# Altium PCB Battery_charger.PcbDoc
Units mm, origin at the board's own origin, x right, y up, seen from the top; angles counter-clockwise.
Board outline 37.85 x 30.99 mm, 2 copper layers (Top Layer, Bottom Layer); 16 components, 12 nets, 60 pads, 17 vias.
Unrouted connection lines stored in the file: 1.
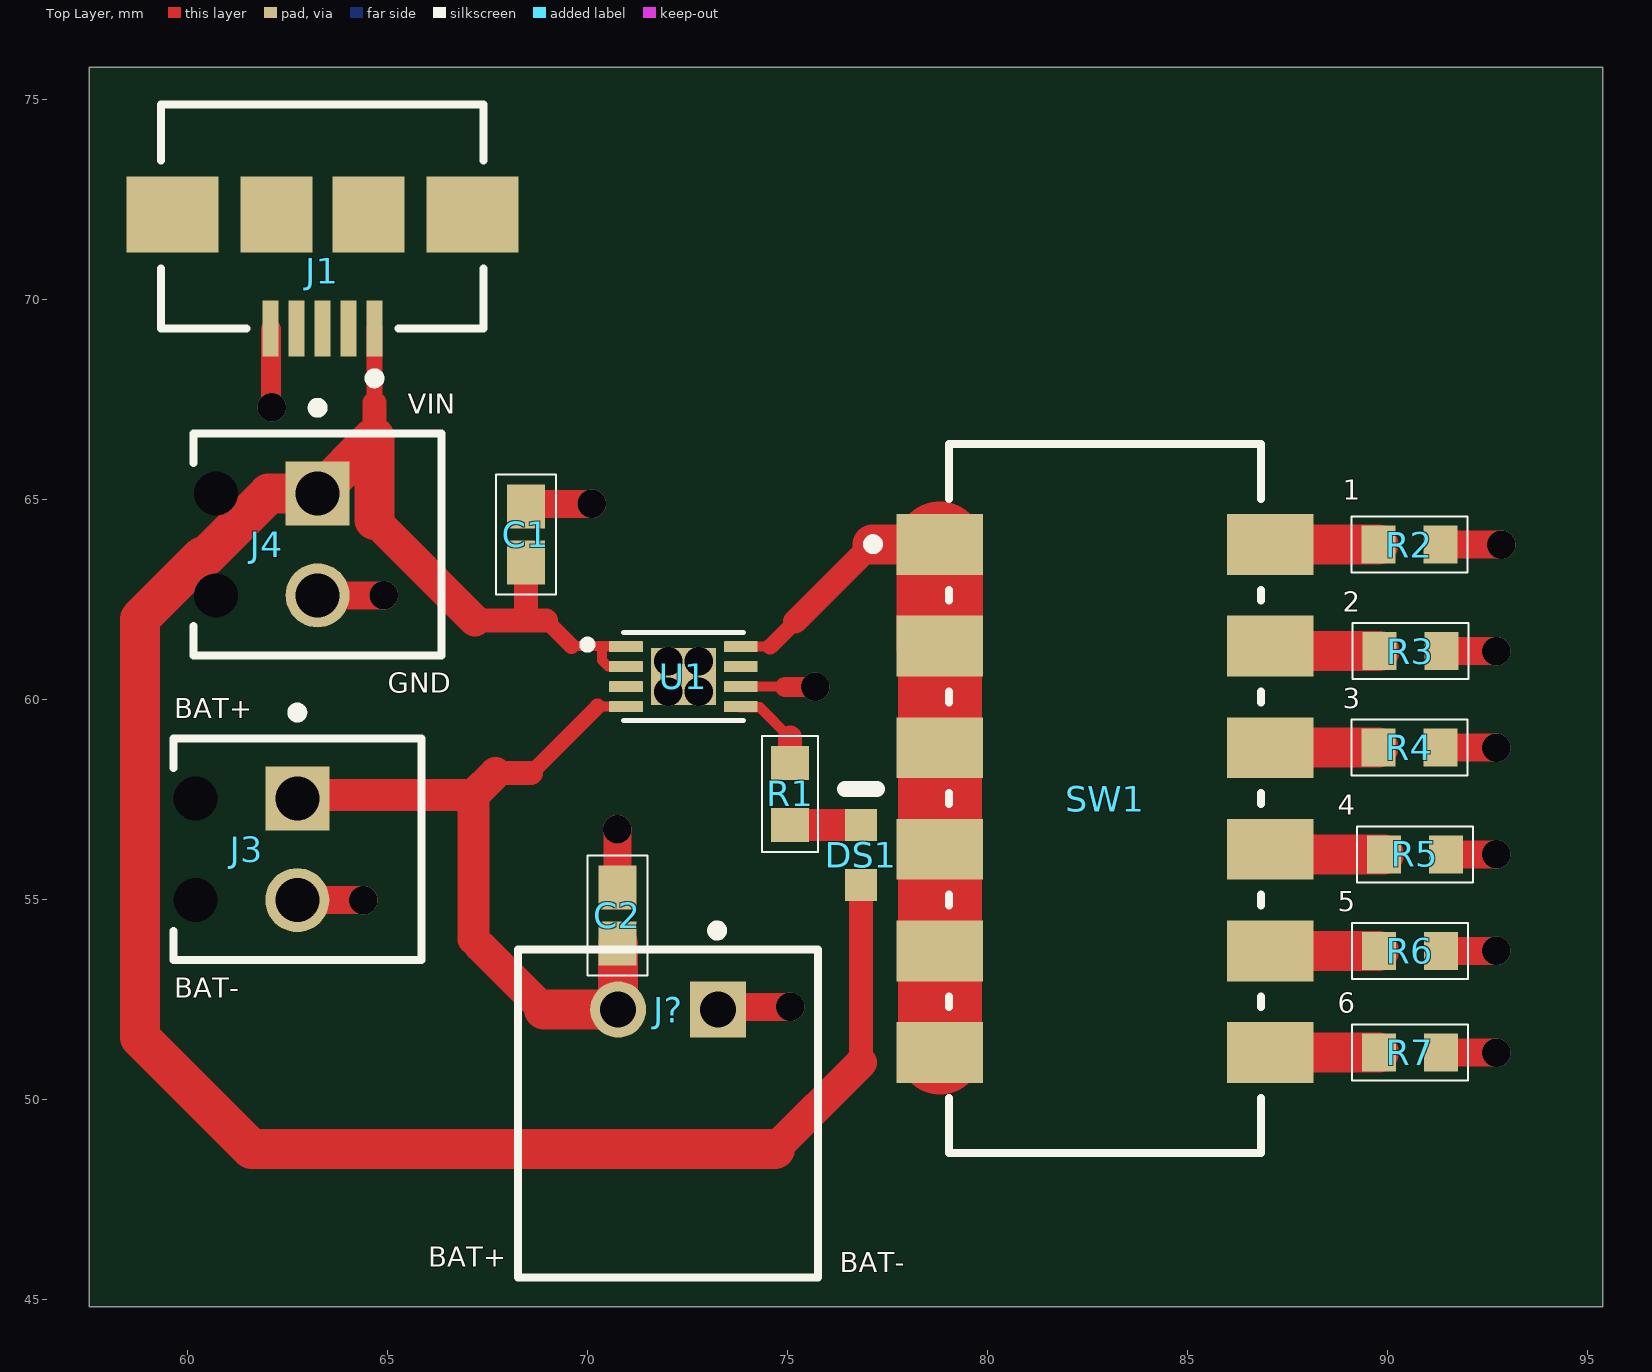
[diagram p0: Top Layer view]
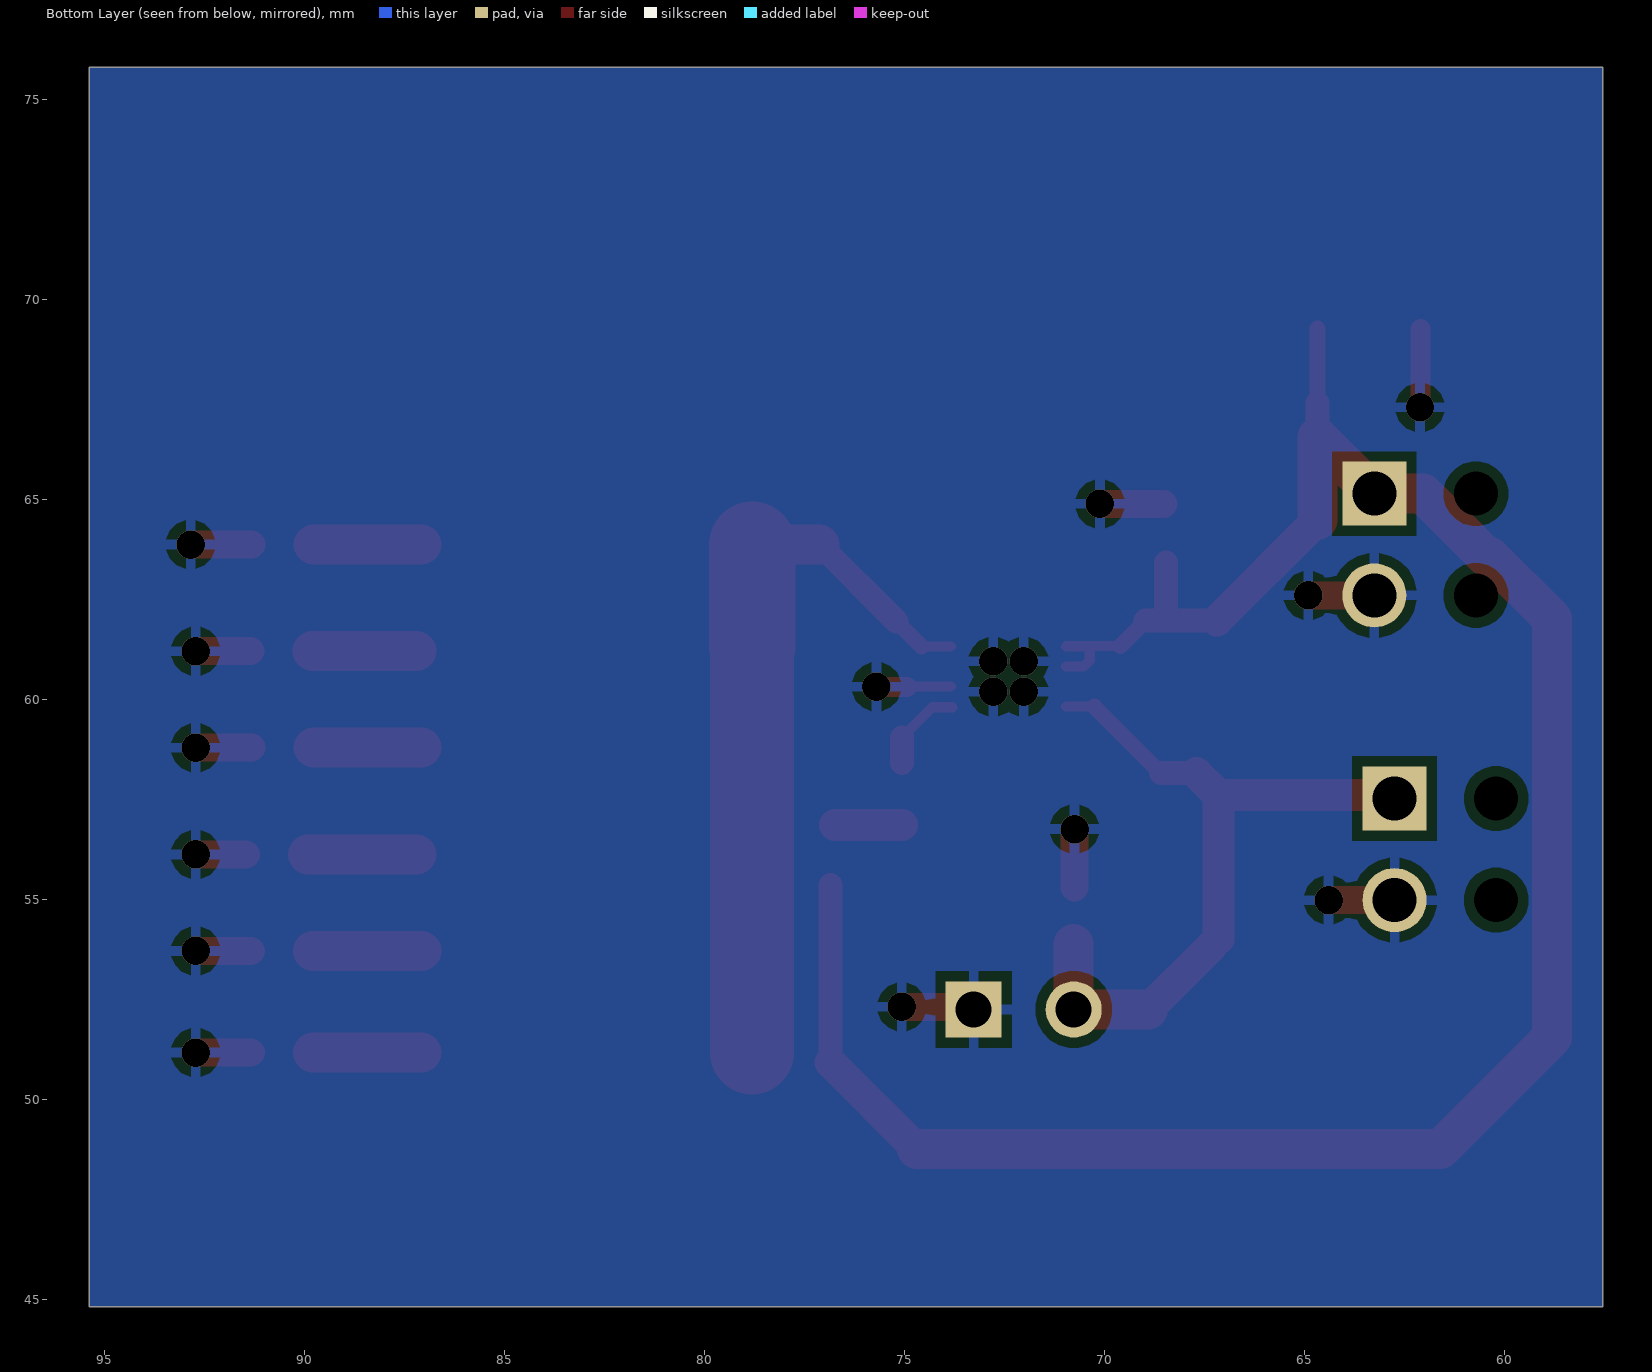
[diagram p1: Bottom Layer view, seen from below]
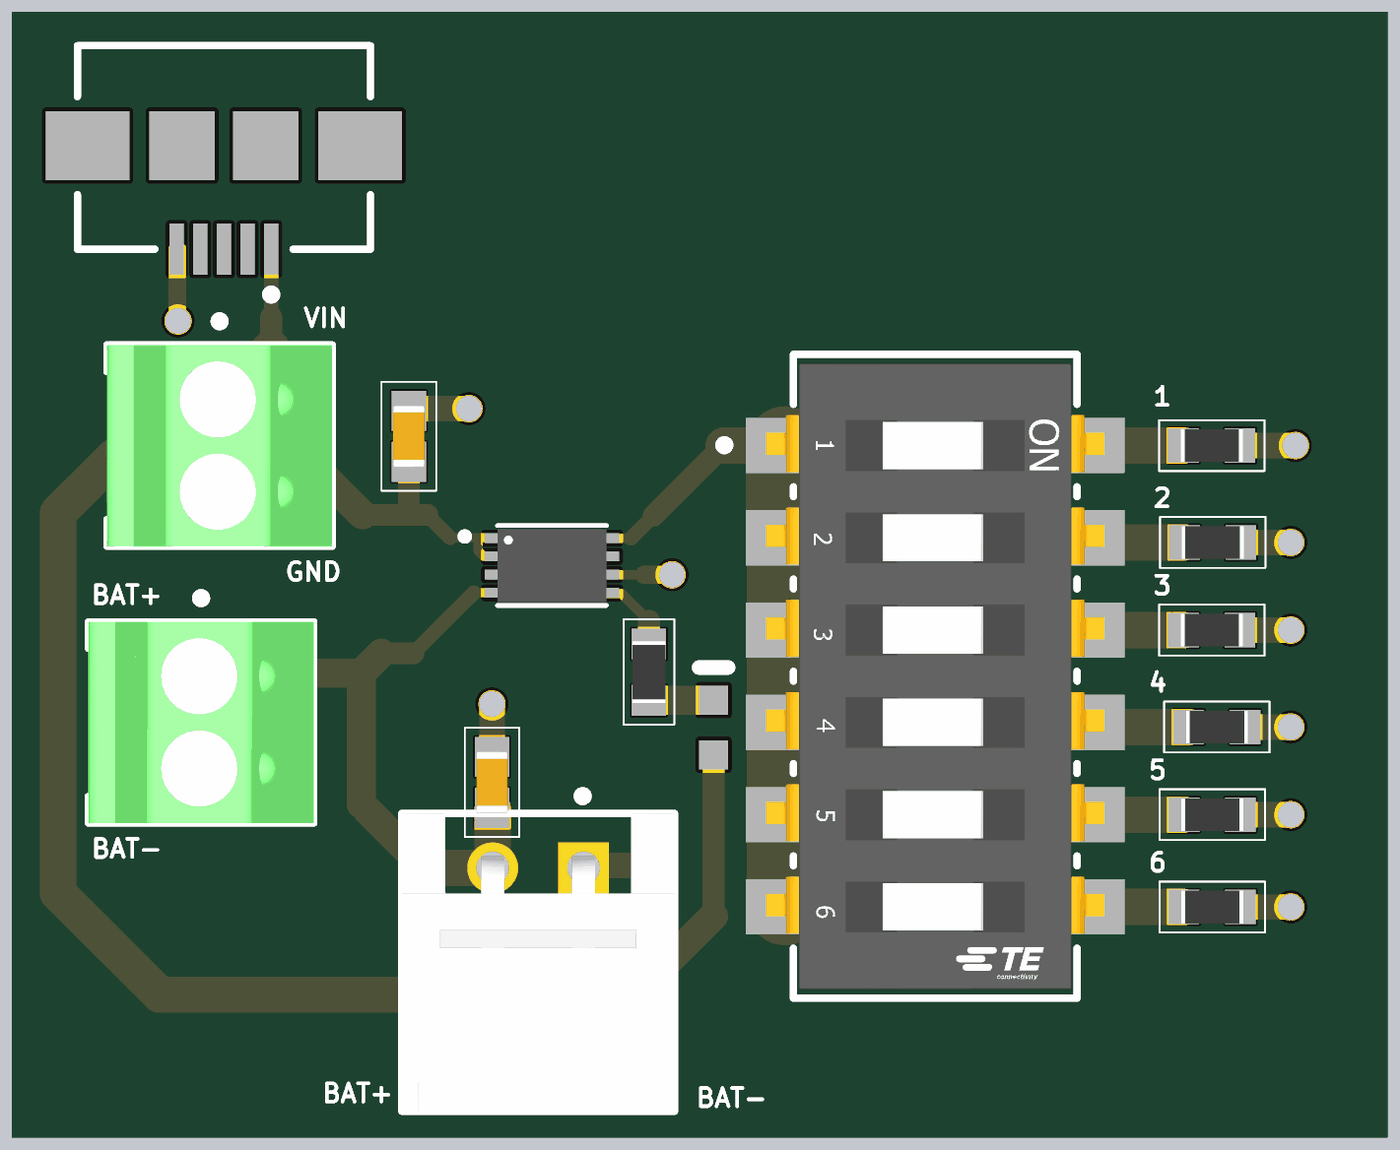
[diagram p2: 3D render of the assembled board from above, using the file's embedded part models]

## Layer stack, top to bottom
Top Solder: solder mask 0.0102, Solder Resist, Dk 3.5
Top Layer: signal copper 0.0356
Dielectric 1: dielectric 0.32, FR-4, Dk 4.8
Bottom Layer: signal copper 0.0356
Bottom Solder: solder mask 0.0102, Solder Resist, Dk 3.5

## Board outline
57.531,44.831 95.377,44.831 95.377,75.819 57.531,75.819

## Design rules (kind name [scope] priority, off if disabled: settings)
Clearance [All] p1: gap=0.254 ignorepadtopadclearanceinfootprint=FALSE
PolygonConnect [All] p1: connectstyle=Relief reliefconductorwidth=0.254 reliefentries=4 polygonreliefangle="90 Angle" airgapwidth=0.254
RoutingVias [All] p1: holewidth=0.711 width=1.27 viastyle="Through Hole" minholewidth=0.711 minwidth=1.27 maxholewidth=0.711 maxwidth=1.27
SolderMaskExpansion [All] p1: expansion=0.102 istentingtop=FALSE
SupplyNets "Schematic Supply Nets" [InNet('GND')] p1: voltage=0.000
Width [All] p1: maxlimit=0.254 minlimit=0.254 preferedwidth=0.254
30 further rules are at their usual default settings.

## Components (designator, comment, footprint, x,y, rotation, side; value= is the part's Value field where it differs from the comment)
C1 "4.7 uF" CAP_0603 68.453,64.135 r270 top
C2 "4.7 uF" CAP_0603 70.739,54.61 r270 top
DS1 "HSMH-C190" HSMH-C190 76.835,56.122 r90 top
J1 "10104110-0001LF" FCI-10104110-0001LF_V 63.366,70.711 r180 top
J3 "1725656" PHOE-1725656-2 62.738,56.261 r270 top
J4 "1725656" PHOE-1725656-2 63.246,63.881 r270 top
J? "S2B-EH(LF)(SN)" FP-S2B-EH_LF_SN-MFG 72.009,49.657 r180 top
R1 "1 k" RES_0603 75.057,57.645 r270 top
R2 "10 k" RES_0603 90.538,63.881 r0 top
R3 "RES_0603" RES_0603 90.564,61.214 r0 top
R4 "5.1 k" RES_0603 90.538,58.801 r0 top
R5 "3.3 k" RES_0603 90.678,56.134 r0 top
R6 "2.4 k" RES_0603 90.551,53.721 r0 top
R7 "2 k" RES_0603 90.551,51.181 r0 top
SW1 "3-1825059-0" FP-3-1825059-0-MFG 82.931,57.531 r0 top
U1 "MCP73831-2ACI/MC" SON50P200X300X100-9N 72.39,60.579 r0 top

## Footprints (in the part's own frame and the unit in brackets; to place one, negate y for a bottom-side part, rotate by r counter-clockwise, add the part's x,y. Pads: shape width x height; smd on the part's side, far side on the other; paste and mask are expansions set on the pad)
CAP_0603 [mm]
  rect 1.1x0.95 smd mask+0.05: 1(-0.7,0) 2(0.7,0)
  silkscreen extent -1.5,-0.75 1.5,0.75, body extent -0.85,-0.44 0.85,0.44, height 0.87
FCI-10104110-0001LF_V [mm] "SMD, 5-Leads, Body 8.06x5.6mm, Pitch 0.65mm"
  rect 0.4x1.4 smd: 1(-1.3,1.425) 2(-0.65,1.425) 3(0,1.425) 4(0.65,1.425) 5(1.3,1.425)
  rect 1.8x1.9 smd: 6(-1.15,-1.425) 7(1.15,-1.425)
  rect 2.3x1.9 smd: 8(-3.75,-1.425) 9(3.75,-1.425)
  silkscreen extent -4.03,-4.17 4.03,2.8, body extent -4.03,-4.17 4.03,1.43, height 2.95
FP-3-1825059-0-MFG [mm]
  rect 2.16x1.52 smd paste+0 mask+0: 1(-4.13,6.35) 2(-4.13,3.81) 3(-4.13,1.27) 4(-4.13,-1.27) 5(-4.13,-3.81) 6(-4.13,-6.35) 7(4.13,-6.35) 8(4.13,-3.81) 9(4.13,-1.27) 10(4.13,1.27) 11(4.13,3.81) 12(4.13,6.35)
  silkscreen extent -5.92,-8.86 3.9,8.86, body extent -5.31,-8.96 5.31,8.96, height 0.25
FP-S2B-EH_LF_SN-MFG [mm]
  rect 1.4x1.4 hole 0.9 paste-2539.97 mask+0: 1(-1.25,-2.6)
  round 1.4 hole 0.9 paste-2539.97 mask+0: 2(1.25,-2.6)
  silkscreen extent -3.75,-4.7 3.75,4.1, body extent -3.85,-4.2 3.85,4.2, height 0.25
HSMH-C190 [mm] "SMD, 2-Leads, Body 1.6x0.8mm, Height 0.9mm"
  rect 0.8x0.8 smd: 1(-0.75,0) 2(0.75,0)
  silkscreen extent 1.65,-0.4 1.65,0.4, body extent -0.8,-0.4 0.8,0.4, height 0.9
PHOE-1725656-2 [mm] "Connector, 2-Leads, Body 6.2x5.4mm, Pitch 2.54mm"
  rect 1.6x1.6 hole 1.1: 1(-1.27,0)
  round 1.6 hole 1.1: 2(1.27,0)
  round 0 hole 1.1 unplated: MH1(-1.27,-2.54) MH2(1.27,-2.54)
  silkscreen extent -3.54,-3.1 2.77,3.1, body extent -2.77,-3.1 2.77,3.1, height 9
RES_0603 [mm]
  rect 0.85x0.95 smd mask+0.05: 1(-0.775,0) 2(0.775,0)
  silkscreen extent -1.45,-0.7 1.45,0.7, body extent -0.85,-0.45 0.85,0.45, height 0.55
SON50P200X300X100-9N [mm]
  rrect7% 0.84x0.27 smd: 1(-1.435,0.75) 2(-1.435,0.25) 3(-1.435,-0.25) 4(-1.435,-0.75) 5(1.435,-0.75) 6(1.435,-0.25) 7(1.435,0.25) 8(1.435,0.75)
  rect 1.625x1.425 smd paste-2: 9(0,0)
  silkscreen extent -2.5,-1.1 1.5,1.1, body extent -1.5,-1 1.5,1, height 1

## Part data
C1 C2: library part CAP_0603, "Capacitor SMD 0603 Generic", Capacitance="100 nF", LCSC Part Number=C92490, Manufacturer=YAGEO, Manufacturer Part Number=CC0603KRX7R8BB104, Tolerance=10%
DS1: "LED Uni-Color Red, 65 mW, 20 mA, -40 to 85 degC, 2-Pin SMD, RoHS, Tape and Reel", Current Rating="1 A", Max Operating Temperature="85 degC", Min Operating Temperature="-30 degC", Package Quantity=2000, ComponentLink1Description="Manufacturer URL", ComponentLink1URL=http://www.avagotech.com/, ComponentLink2Description=Datasheet, ComponentLink2URL=http://docs.avagotech.com/docs/AV02-0551EN, ComponentLink3Description="Package Specification", ComponentLink3URL=http://www.fairchildsemi.com/dwg/MA/MA03D.pdf, Connector Type=USB, Contact Material=Copper, Contact Plating=Gold, DatasheetVersion=Mar-12, Gender=Male, Height="2.8 mm", Lead Pitch="0.65 mm", Length="7.5 mm", Mount="Surface Mount", PackageDescription="2-Pin Surface Mount Device, Body 1.6 x 0.8 mm, Height 0.9 mm", PackageReference=HSMX-C190, Packaging="Tape and Reel", Pins=5, REACH SVHC="No SVHC", RoHSCompliant=true, Width="5.6 mm"
J1: library part CMP-2000-05823-1, "Micro USB, Receptacle, -55 to 85 degC, 5-Pin SMD, RoHS, Tape and Reel", Manufacturer="FCI Electronics", Package Description="5-Pin Surface Mount Device, Body 8.06 x 5.6 mm, Pitch 0.65 mm", Connector Mounting=PCB, Connector Type=USBMicroB, Contact Plating=Gold, Contact Termination=SurfaceMountRightAngle, Datasheet URL=http://portal.fciconnect.com/Comergent//fci/drawing/10104110.pdf, Datasheet Version="Rev. C, 03/2011", Gender=Receptacle, Manufacturer URL=http://portal.fciconnect.com/, Mounting Technology=SurfaceMount, No. of Contacts=5, Package Reference=10104110-0001LF
J3 J4: library part CMP-2000-05299-1, "Male Header, Pitch 2.54 mm, 1 x 2 Position, Height 9 mm, Tail Length 3.5 mm", Colour=Green, Manufacturer="Phoenix Contact", Content=250pc(s), Datasheet URL=http://datasheet.octopart.com/1725656-Phoenix-Contact-datasheet-5302866.pdf, Datasheet Version=Apr-08, Industrial packaging=Yes, Manufacturer part No.=1725656, Manufacturer URL=http://www.phoenixcontact.com/, Number Of Contacts=2, Pitch=2.54mm, Type=MPT0,5/2-2,54
J?: library part CMP-00504-00248789-1, "S2B-EH(LF)(SN) Board Connector, 2 Contact(s), 1 Row(s), Male, Right Angle, Solder Terminal, ROHS COMPLIANT", Contact Resistance=20mΩ, Current Rating=3A, Housing Color=White, Max Operating Temperature=85°C, Max Voltage Rating (AC)=250V, Min Operating Temperature=-25°C, Connector Type="Male Pin", Contact Material=Brass, Contact Mating Length=3.9878mm, Contact Plating=Tin, Depth=8.2mm, Fastening Type=Latch, Gender=Male, Height=4.2mm, Housing Material=Nylon, Lead Free="Lead Free", Lead Pitch=2.5mm, Length=7.5mm, Max Current Rating=3A, Mount="Through Hole", NexarPartId=248789, Number Of Contacts=2, Number of Positions=2, Number of Rows=1, Orientation="Right Angle", Packaging=Bulk, Pitch=2.5mm, REACH SVHC="No SVHC", RoHS=Compliant, Termination=Press-Fit, Voltage Rating=250V, Width=8.2mm
R1 R2 R4 R5 R6 R7: library part RES_0603, "Resistor SMD 0603 Generic", LCSC Part Number=C5197511, Manufacturer=YAGEO, Manufacturer Part Number=NT0603BRD0711K1L, Resistance="11.1 kOhm", Tolerance=0.1%
R3: "Resistor SMD 0603 Generic", LCSC Part Number=C5197511, Manufacturer=YAGEO, Manufacturer Part Number=NT0603BRD0711K1L, Resistance="11.1 kOhm", Tolerance=0.1%
SW1: library part CMP-03400-000026-1, "SWITCH SLIDE DIP SPST 100MA 24V", Contact Current Rating=1A, Contact Resistance=50mR, Flammability Rating="UL94 V-0", Housing Color=Black, Max Current Rating=100mA, Max Operating Temperature=85°C, Max Voltage Rating (DC)=24V, Min Operating Temperature=-30°C, Package Quantity=750, Voltage Rating (DC)=5V, Actuator Length=0mm, Actuator Material=Polyamide, Actuator Type=Standard, Body Material=Polyphenylene, Contact Material="Copper Alloy", Contact Plating=Gold, Depth=9.3mm, Electrical Life=1000Cycles, ELV=Compliant, Height=0.138inch, Housing Material=Polyphenylene, Lead Free="Lead Free", Length=17.22mm, Mechanical Life=1000Cycles, Mount="Surface Mount", Number of Positions=6, Orientation=Straight, Packaging="Tape and Reel", Pitch=0.1inch, Radiation Hardening=No, RoHS Compliant=Yes, Sealable="Yes (With)", Series="ADF, Alcoswitch", Terminal Pitch=2.54mm, Termination="Gull Wing", Throw Configuration=SPST, Type=Switch, Washable=Yes
U1: "Charge Controller Li-Ion/Li-Pol 15mA to 500mA 4.2V 8-Pin DFN EP", Package="VFDFN-8 Microchip", Check_prices=https://www.snapeda.com/parts/MCP73831-2ACI/MC/Microchip/view-part/?ref=eda, MF=Microchip, MP=MCP73831-2ACI/MC, SnapEDA_Link=https://www.snapeda.com/parts/MCP73831-2ACI/MC/Microchip/view-part/?ref=snap

## Via types
v1: diameter 0.711, hole 0.711, Top Layer to Bottom Layer, 17 vias

## Nets (pads, with @x,y where several pads share a name; then routed paths per layer and width w, separated by ;. In a path a pad name is that pad's centre, name@x,y a point inside that pad or via, vN(x,y) a via of type N, cw(c..) or ccw(c..) an arc to the next point about the centre after c; other vN are vias at no path point)
GND: C1.1 C2.1 J1.5 J3.2 J4.2 J?.1 R2.2 R3.2 R4.2 R5.2 R6.2 R7.2 U1.6 U1.9 | length 20.5
  Top Layer w0.254: J1.5 J1.5@62.085,69.267 ; v1@62.085,67.328 v1(62.103,67.31) ; C1.1 C1.1@68.515,64.897 ; U1.6 74.926,60.329 74.93,60.325
  Top Layer w0.5: v1@62.085,67.328 J1.5@62.085,69.267 ; 74.93,60.325 v1(75.692,60.325)
  Top Layer w0.7: J3.2 v1(64.389,54.991) ; J4.2 v1(64.897,62.611) ; C1.1@68.515,64.897 v1(70.104,64.897) ; C2.1 v1(70.739,56.769) ; J?.1 73.259,52.324 73.261,52.322 75.055,52.322 v1(75.057,52.324) ; R4.2 v1(92.71,58.801) ; R2.2 v1(92.837,63.881) ; R7.2 v1(92.71,51.181) ; R6.2 v1(92.71,53.721) ; R3.2 v1(92.71,61.214) ; R5.2 v1(92.71,56.134)
  other v1: 72.009,60.198 72.771,60.198 72.009,60.96 72.771,60.96
NetDS1_2: DS1.2 R1.2 | length 1.8
  Top Layer w0.254: DS1.2@76.722,56.985 DS1.2
  Top Layer w0.8: R1.2 DS1.2@76.722,56.87
NetR1_1: R1.1 U1.5 | length 2.2
  Top Layer w0.254: U1.5@73.791,59.813 74.299,59.813 75.057,59.055
  Top Layer w0.6: R1.1 75.057,59.055
NetR2_1: R2.1 SW1.12 | length 2.7
  Top Layer w1: SW1.12 R2.1
NetR3_1: R3.1 SW1.11 | length 2.8
  Top Layer w0.254: SW1.11 SW1.11@87.188,61.214
  Top Layer w1: SW1.11@87.188,61.214 R3.1
NetR4_1: R4.1 SW1.10 | length 2.7
  Top Layer w1: SW1.10 R4.1
NetR5_1: R5.1 SW1.9 | length 2.9
  Top Layer w0.254: SW1.9 SW1.9@87.188,56.134
  Top Layer w1: SW1.9@87.188,56.134 R5.1
NetR6_1: R6.1 SW1.8 | length 2.7
  Top Layer w1: SW1.8 R6.1
NetR7_1: R7.1 SW1.7 | length 2.7
  Top Layer w1: SW1.7 R7.1
PROG: SW1.1 SW1.2 SW1.3 SW1.4 SW1.5 SW1.6 U1.8 | length 18.7
  Top Layer w0.254: U1.8 74.561,61.329
  Top Layer w0.4: 74.561,61.329 75.184,61.952
  Top Layer w0.6: 75.184,61.952 77.113,63.881
  Top Layer w1: 77.113,63.881 SW1.1
  Top Layer w2.1: SW1.6 SW1.5 SW1.4 SW1.3 SW1.2
  Top Layer w2.16: SW1.2 SW1.1
VBAT: C2.2 J3.1 J?.2 U1.3 U1.4 | length 18.8
  Top Layer w0.254: J3.1@63.246,58.039 J3.1@63.333,58.126 ; 67.143,54.015 67.31,53.848 ; 70.243,59.829 U1.4 ; C2.2 C2.2@70.759,53.89
  Top Layer w0.4: 68.58,58.166 70.243,59.829
  Top Layer w0.6: 67.691,58.166 68.58,58.166
  Top Layer w0.8: J3.1@62.825,57.618 67.143,57.618 ; 67.143,54.015 67.143,57.618 ; 67.31,53.848 68.901,52.257 ; 67.691,58.166 67.143,57.618
  Top Layer w1: 68.901,52.257 J?.2 C2.2@70.759,53.89
VIN: C1.2 DS1.1 J1.1 J4.1 U1.1 U1.2 | length 57.6
  Top Layer w0.254: 60.365,63.587 60.458,63.587 ; 69.596,61.341 70.358,61.341 ; U1.2 70.951,60.833 70.507,60.833 70.358,60.982 70.358,61.341 ; U1.1 70.947,61.337 70.362,61.337 70.358,61.341
  Top Layer w0.4: 64.666,67.414 J1.1 ; 68.961,61.976 69.596,61.341
  Top Layer w0.6: 64.666,66.571 64.666,67.414 ; 67.183,61.976 68.453,61.976 ; C1.2 68.453,61.976 ; 68.961,61.976 68.453,61.976 ; 76.835,50.927 DS1.1
  Top Layer w0.8: 64.666,64.493 67.183,61.976 ; 74.676,48.768 76.835,50.927
  Top Layer w1: 60.365,63.587 58.801,62.023 58.801,51.562 61.595,48.768 74.676,48.768 ; 60.458,63.587 62.023,65.151 J4.1 64.666,66.571 64.666,64.493
pads on no net: J1.2 J1.3 J1.4 J1.6 J1.7 J1.8 J1.9 J3.MH1 J3.MH2 J4.MH1 J4.MH2 U1.7

## Polygon pours and split planes (outlines as drawn)
GND on Bottom Layer "GND_L02_P002" (solid, pour order 2): 57.531,44.831 95.377,44.831 95.377,75.819 57.531,75.819

## Silkscreen, mask and mechanical layers (free items; w line width, h text height)
Top Overlay:
  text "VIN" at 65.505,67.156 h0.5
  text "1" at 88.873,64.997 h0.5
  text "2" at 88.873,62.203 h0.5
  text "GND" at 64.997,60.171 h0.5
  text "3" at 88.873,59.79 h0.5
  text "BAT+" at 59.663,59.536 h0.5
  text "4" at 88.746,57.123 h0.5
  text "5" at 88.746,54.71 h0.5
  text "BAT-" at 59.663,52.551 h0.5
  text "6" at 88.746,52.17 h0.5
  text "BAT+" at 66.013,45.82 h0.5
  text "BAT-" at 76.3,45.693 h0.5

## Text inside footprints (layer, text, board x,y; h text height)
J1: Top Courtyard "PCB EDGE" at 71.494,73.759 h0.3 r180